# EAGLE board test_schem (EAGLE 8.7.1)
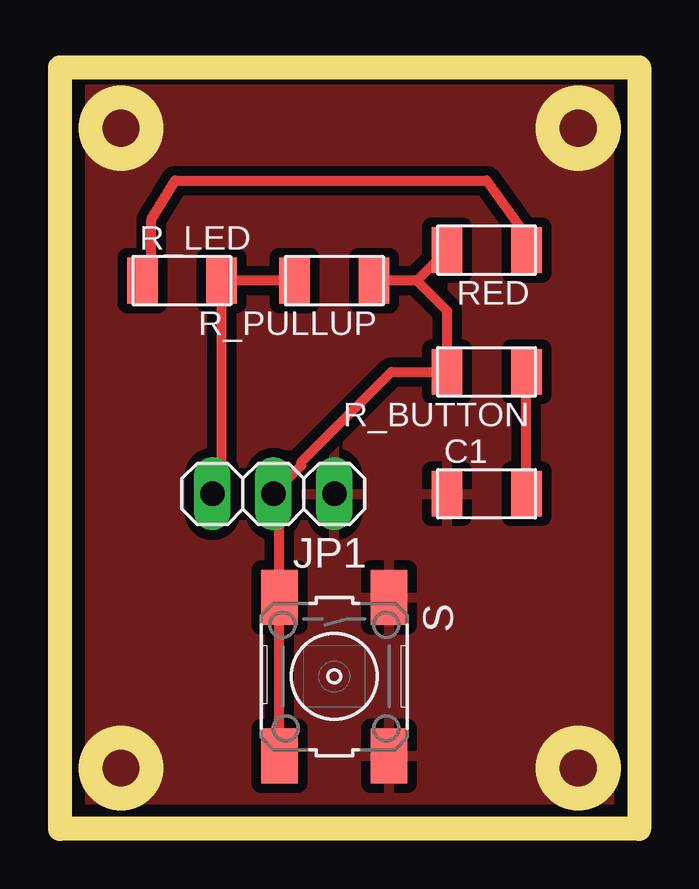
[diagram p0: board, top side]

Size 24.11 x 32.05 mm. Coordinates in mm from the lower left corner, seen from the top.
Outline: 0,0 24.11,0 24.11,32.05 0,32.05 0,0
Copper layers (1*16): Top 0.035mm / dielectric 1.5mm / Bottom 0.035mm
Design rules "default *": minimum track width 16mil, minimum drill 0.35mm, track to track 16mil, track to pad 16mil, pad to pad 16mil, via to via 16mil, smd to smd 16mil, copper to edge 40mil, drill to drill 6mil, minimum pad ring 10mil, minimum via ring 8mil, stop-mask expansion 4mil, vias tented up to drill 0mil, thermal gap 16mil
Milling: area 1.3,27.9 to 3.8,30.5; area 20.3,27.9 to 22.9,30.5; area 20.3,1.3 to 22.9,3.8; area 1.3,1.3 to 3.8,3.8; 4 lines

## Footprints (pad centres in the part's own frame; a part is rotated, then mirrored left to right if it is on the bottom)
C1206FAB = smd 1.27 x 1.905: 1 -1.651,0; 2 1.651,0
1X03 = drill 1.016 long: 1 -2.54,0; 2 0,0; 3 2.54,0
R1206FAB = smd 1.27 x 1.905: 1 -1.651,0; 2 1.651,0
LED1206FAB = smd 1.27 x 1.905: 1 -1.651,0; 2 1.651,0
6MM_SWITCH = smd 2.286 x 1.524: 1 -3.302,2.286; 2 3.302,2.286; 3 -3.302,-2.286; 4 3.302,-2.286

## Placement (x,y rotation side)
C1  10nF  [C1206FAB]  17.78,13.97 0 top
JP1  [1X03]  8.89,13.97 180 top
R_BUTTON  49.9k  [R1206FAB]  17.78,19.05 180 top
R_LED  499  [R1206FAB]  5.08,22.86 0 top
R_PULLUP  49.9k  [R1206FAB]  11.43,22.86 180 top
RED  [LED1206FAB]  17.78,24.13 180 top
S  [6MM_SWITCH]  11.43,6.35 270 top

## Library data of the parts
C1 R_BUTTON R_LED R_PULLUP RED S = fab
JP1 = pinhead

## Nets
+5V: JP1.3 R_LED.2 R_PULLUP.2
BUTTON: JP1.2 R_BUTTON.2 R_PULLUP.1 RED.2 S.3 S.4
GND: C1.1 JP1.1 S.1 S.2
N$2: R_LED.1 RED.1
N$4: C1.2 R_BUTTON.1

## Tracks (layer width: path | path; a pad name or v marks a point on that pad's centre or on a via)
+5V
  Top 0.406: JP1.3 6.73,14.35 R_LED.2 R_PULLUP.2
BUTTON
  Top 0.406: S.4 S.3 9.14,13.72 JP1.2 10.06,15.14 10.06,15.3 13.81,19.05 R_BUTTON.2 16.13,21.59 14.86,22.86 | RED.2 14.86,22.86 | 14.86,22.86 R_PULLUP.1
GND
  pour Top: 0,0 24.13,0 24.13,32.38 0,32.38
N$2
  Top 0.406: R_LED.1 3.81,23.24 3.81,25.4 4.8,27.03 17.78,27.03 19.43,24.74 RED.1
N$4
  Top 0.406: C1.2 R_BUTTON.1